# Altium PCB Boost.PcbDoc
Units mil, origin at the board's own origin, x right, y up, seen from the top; angles counter-clockwise.
Board outline 7240 x 4900 mil, 2 copper layers (Top Layer, Bottom Layer); 57 components, 166 nets, 170 pads, 46 vias.
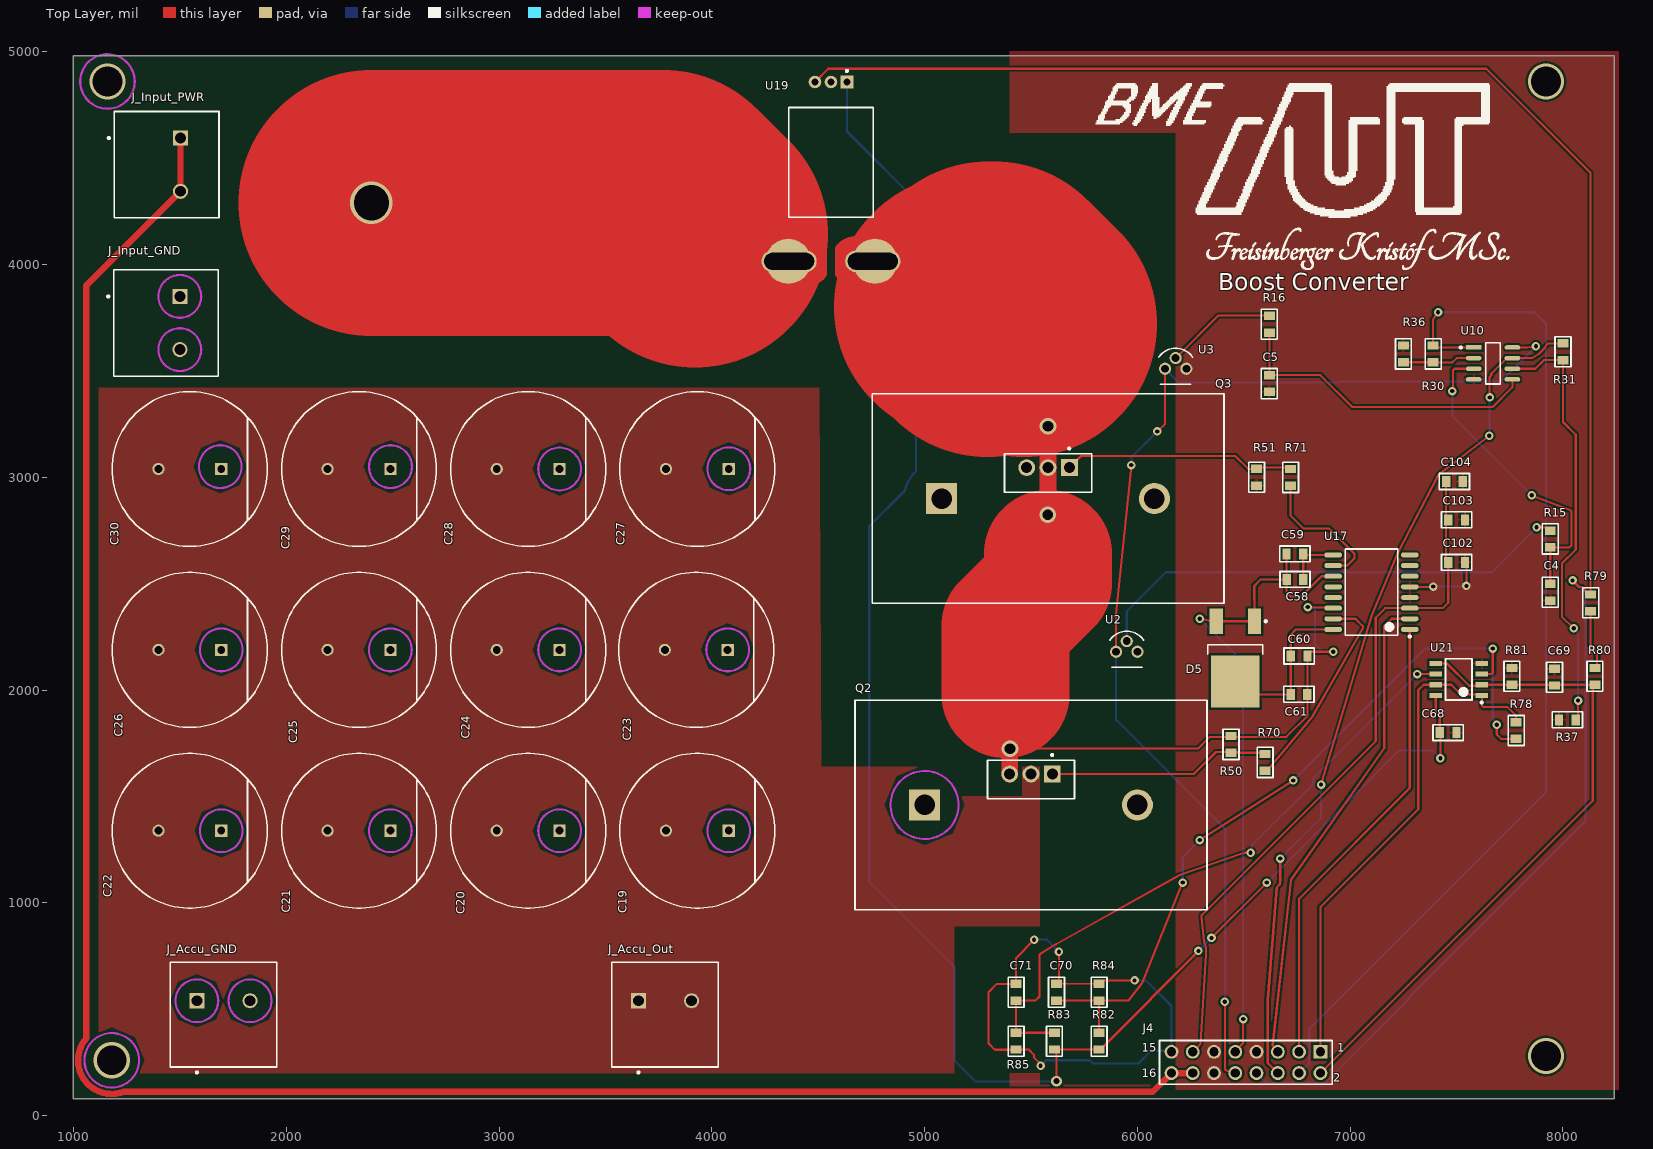
[diagram p0: Top Layer view]
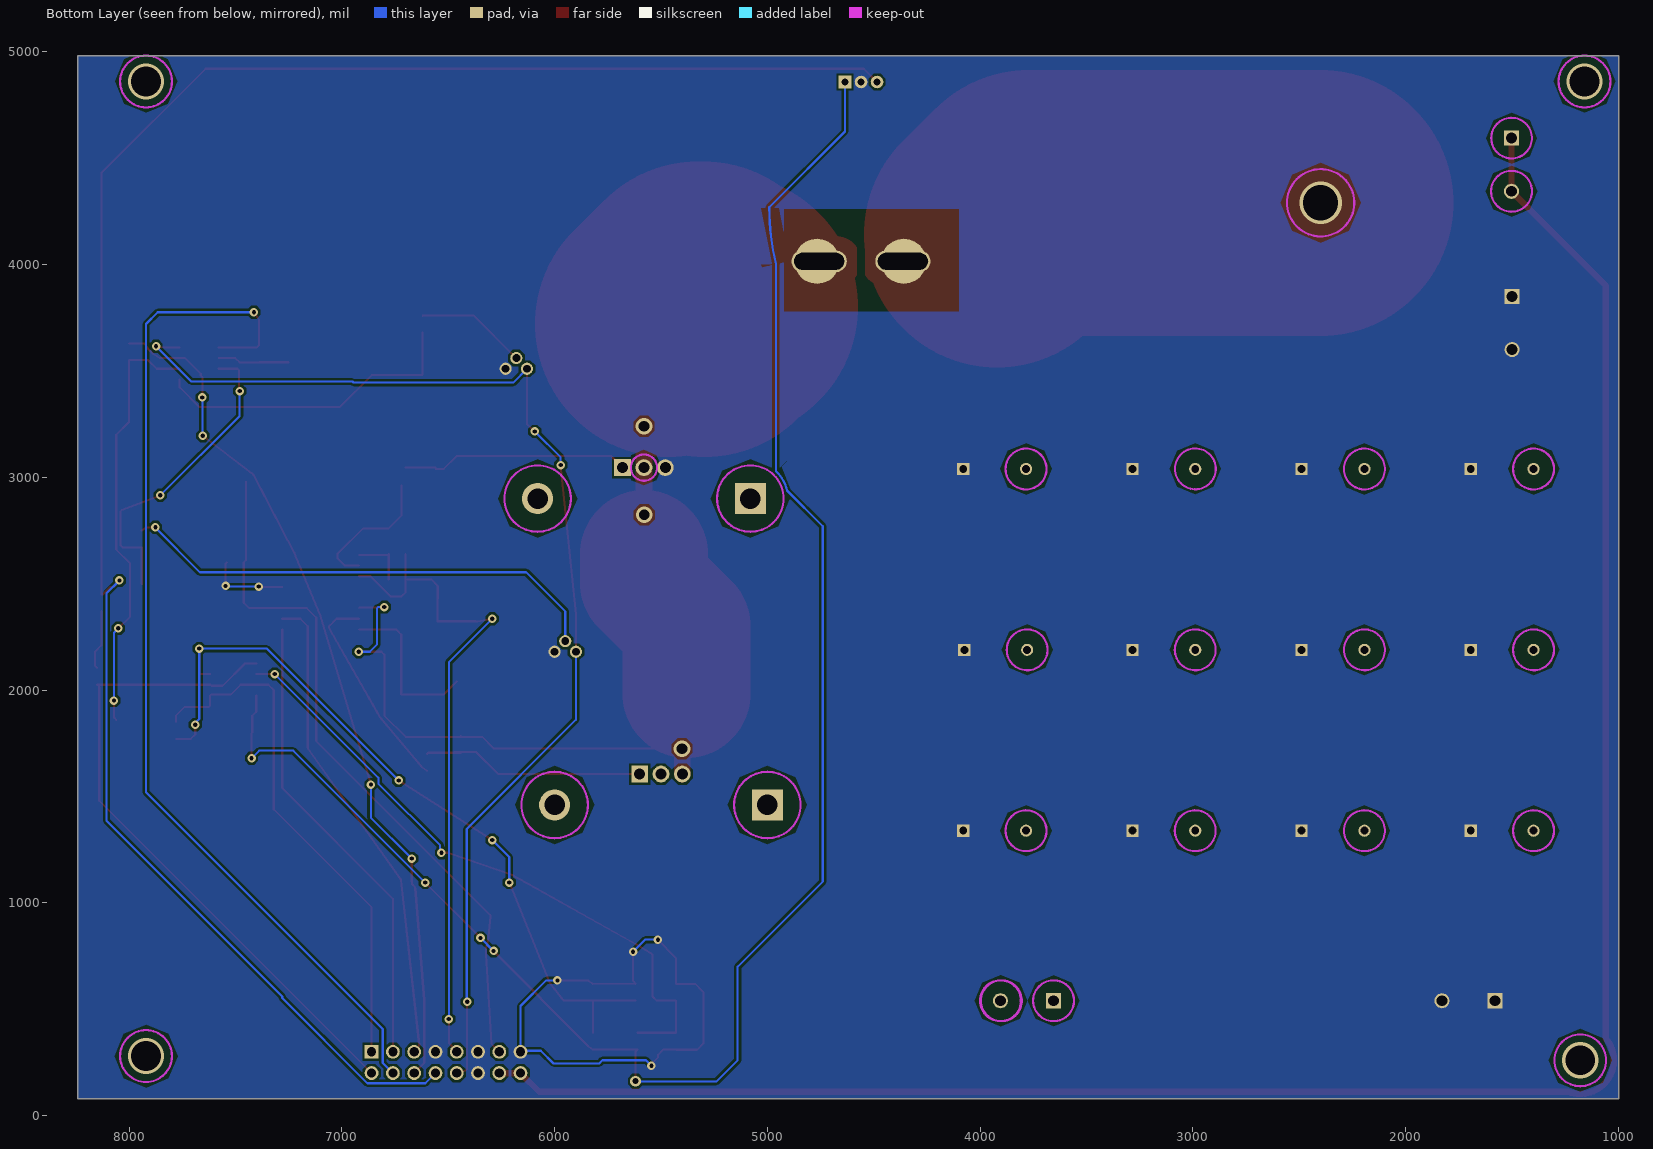
[diagram p1: Bottom Layer view, seen from below]
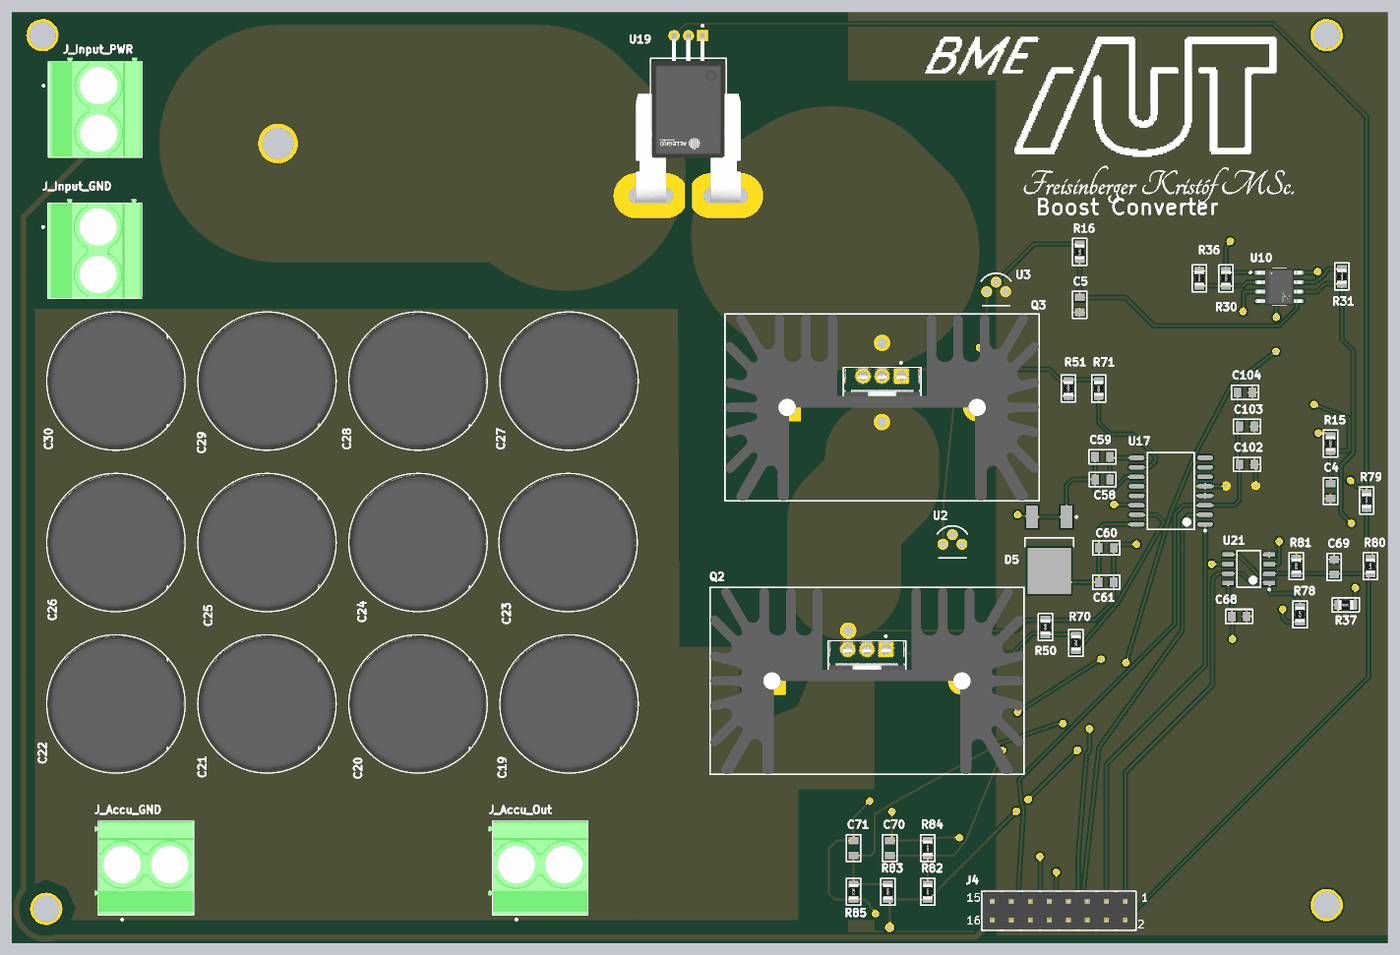
[diagram p2: 3D render of the assembled board from above, using the file's embedded part models]

## Layer stack, top to bottom
Top Solder: solder mask 0.4, Solder Resist, Dk 3.5
Top Layer: signal copper 1.4
Dielectric 1: dielectric 12.6, FR-4, Dk 4.8
Bottom Layer: signal copper 1.4
Bottom Solder: solder mask 0.4, Solder Resist, Dk 3.5

## Board outline
1000,80 8240,80 8240,4980 1000,4980

## Design rules (kind name [scope] priority, off if disabled: settings)
Clearance [All] p1: gap=10 ignorepadtopadclearanceinfootprint=FALSE except(0: Arc-Hole Track-Hole SMDPad-Hole THPad-Hole Via-Hole Fill-Hole Poly-Hole Region-Hole Text-Hole)
PlaneConnect [All] p1: pad.planeconnectstyle=Relief pad.reliefexpansion=20 pad.reliefentries=4 pad.reliefconductorwidth=10 pad.reliefairgap=10 via.planeconnectstyle=Relief via.reliefexpansion=20 via.reliefentries=4 via.reliefconductorwidth=10 via.reliefairgap=30
PolygonConnect [All] p1: thpad.connectstyle=Direct thpad.reliefconductorwidth=10 thpad.reliefentries=4 thpad.polygonreliefangle="90 Angle" thpad.airgapwidth=10 smdpad.connectstyle=Relief smdpad.reliefconductorwidth=10 smdpad.reliefentries=4 smdpad.polygonreliefangle="90 Angle" smdpad.airgapwidth=10 via.connectstyle=Direct via.reliefconductorwidth=10 via.reliefentries=4 via.polygonreliefangle="90 Angle" via.airgapwidth=10
RoutingVias [All] p1: holewidth=10 width=20 viastyle="Through Hole" minholewidth=5 minwidth=10 maxholewidth=28 maxwidth=50
SilkToSolderMaskClearance [IsPad] p1: minsilkscreentomaskgap=12 clearancetoexposedcopper=TRUE
SolderMaskExpansion [All] p1: expansion=4 istentingtop=FALSE
Width Width_1 [All] p1: maxlimit=2000 minlimit=10 preferedwidth=10 minimp=50.000000 maximp=50.000000 favimp=50.000000
Width [All] p2: maxlimit=2000 minlimit=10 preferedwidth=10 minimp=50.000000 maximp=50.000000 favimp=50.000000
28 further rules are at their usual default settings.

## Classes and differential pairs
component class Measurements: C4 C5 R15 R16 R30 R31 R36 R37 U2 U3 U10
component class Hall_sensor: C68 C69 C70 C71 R78 R79 R80 R81 R82 R83 R84 R85 U19 U21
component class Gate-Driver: C58 C59 C60 C61 C102 C103 C104 D5 R70 R71 U17
component class BoostConverter: C19 C20 C21 C22 C23 C24 C25 C26 C27 C28 C29 C30 F1 J4 J_Accu_GND J_Accu_Out J_Input_GND J_Input_PWR Q3 R50 R51

## Components (designator, comment, footprint, x,y, rotation, side; value= is the part's Value field where it differs from the comment)
C4 "22uF" FP_0805_CAP_085 7940,2460 r90 top
C5 "22uF" FP_0805_CAP_085 6620,3440.63 r90 top
C19 "330 uF" FP-LXW18X25-MFG 3932,1339 r180 top
C20 "330 uF" FP-LXW18X25-MFG 3137,1339 r180 top
C21 "330 uF" FP-LXW18X25-MFG 2342,1339 r180 top
C22 "330 uF" FP-LXW18X25-MFG 1547,1339 r180 top
C23 "330 uF" FP-LXW18X25-MFG 3927,2189 r180 top
C24 "330 uF" FP-LXW18X25-MFG 3137,2189 r180 top
C25 "330 uF" FP-LXW18X25-MFG 2342,2189 r180 top
C26 "330 uF" FP-LXW18X25-MFG 1547,2189 r180 top
C27 "330 uF" FP-LXW18X25-MFG 3932,3039 r180 top
C28 "330 uF" FP-LXW18X25-MFG 3137,3039 r180 top
C29 "330 uF" FP-LXW18X25-MFG 2342,3039 r180 top
C30 "330 uF" FP-LXW18X25-MFG 1547,3039 r180 top
C58 "100nF" FP_0805_CAP_085 6740.63,2520 r180 top
C59 "1uF" FP_0805_CAP_085 6740,2640 r180 top
C60 "100nF" FP_0805_CAP_085 6760,2160 r180 top
C61 "1uF" FP_0805_CAP_085 6759.37,1980 r180 top
C68 "100nF" FP_0805_CAP_085 7460,1800 r0 top
C69 "68nF" FP_0805_CAP_085 7960,2060.63 r90 top
C70 "100nF" FP_0805_CAP_085 5620,580 r90 top
C71 "100nF" FP_0805_CAP_085 5430,580 r90 top
C102 "100nF" FP_0805_CAP_085 7500,2600 r180 top
C103 "100nF" FP_0805_CAP_085 7500,2800 r180 top
C104 "100nF" FP_0805_CAP_085 7490,2980 r180 top
D5 "MBRD360T4G" ONSC-DPAK-3-369C-01_V 6460,2150.24 r270 top
J4 "61301621121" 61301621121 6510,250 r180 top
J_Accu_GND "1714955" Terminal-PHOE-1714955_V 1705,540 r0 top
J_Accu_Out "1714955" Terminal-PHOE-1714955_V 3780,540 r0 top
J_Input_GND "1714955" Terminal-PHOE-1714955_V 1500,3725 r270 top
J_Input_PWR "1714955" Terminal-PHOE-1714955_V 1503,4469 r270 top
Q2 "PSMN8R5-100PS" FP-TO-220AB-MFG 5500,1580 r270 top
Q3 "" FP-TO-220AB-MFG 5580,3020 r270 top
R15 "10K" FP_0805_RES 7940,2710 r270 top
R16 "10K" FP_0805_RES 6620,3719.37 r270 top
R30 "10K" FP_0805_RES 7390,3580 r270 top
R31 "10K" FP_0805_RES 8000,3590 r270 top
R36 "10K" FP_0805_RES 7250,3580 r270 top
R37 "10K" FP_0805_RES 8020.63,1860 r0 top
R50 "3.3K" FP_0805_RES 6440,1744.57 r270 top
R51 "3.3K" FP_0805_RES 6560,3000 r270 top
R70 "1.8" FP_0805_RES 6600,1660 r90 top
R71 "1.8" FP_0805_RES 6720,2999.37 r90 top
R78 "3K" FP_0805_RES 7780,1810 r270 top
R79 "220" FP_0805_RES 8130,2410 r90 top
R80 "10K" FP_0805_RES 8150,2064.57 r270 top
R81 "20K" FP_0805_RES 7760.01,2064.57 r90 top
R82 "10K" FP_0805_RES 5820,350 r90 top
R83 "22K" FP_0805_RES 5610,350 r90 top
R84 "20K" FP_0805_RES 5820,580 r90 top
R85 "10K" FP_0805_RES 5430,350 r270 top
U2 "MCP9700-E/TO" FP-C04-101-MFG 5950,2191.25 r270 top
U3 "MCP9700-E/TO" FP-C04-101-MFG 6180,3521.25 r270 top
U10 "LM358DR2G" FP-751-07-IPC_C 7671.18,3535 r0 top
U17 "2EDS8265HXUMA2" EXAR-WSOIC-16_N 7100,2460 r180 top
U19 "ACS758LCB-050B-PFF-T" FP-CB-5-PFF-MFG 4560,4480 r180 top
U21 "LM393DR2G" ONSC-SOIC-8-751-07_V 7510,2050 r180 top

## Footprints (in the part's own frame and the unit in brackets; to place one, negate y for a bottom-side part, rotate by r counter-clockwise, add the part's x,y. Pads: shape width x height; smd on the part's side, far side on the other; paste and mask are expansions set on the pad)
61301621121 [mm] "Pin Header, pitch 2.54 mm, THT, Vertical, dual row, 16p"
  rect 1.65x1.65 hole 1.1: 1(-8.89,-1.27)
  round 1.65 hole 1.1: 2(-8.89,1.27) 3(-6.35,-1.27) 4(-6.35,1.27) 5(-3.81,-1.27) 6(-3.81,1.27) 7(-1.27,-1.27) 8(-1.27,1.27) 9(1.27,-1.27) 10(1.27,1.27) 11(3.81,-1.27) 12(3.81,1.27) 13(6.35,-1.27) 14(6.35,1.27) 15(8.89,-1.27) 16(8.89,1.27)
  silkscreen extent -10.31,-2.61 10.31,2.61, body extent -10.16,-2.54 10.16,2.54, height 8.59
EXAR-WSOIC-16_N [mm] "SOIC, 16-Leads, Body 10.30x7.50mm, Pitch 1.27mm, IPC Medium Density"
  oval 2.1x0.6 smd: 1(-4.575,4.445) 2(-4.575,3.175) 3(-4.575,1.905) 4(-4.575,0.635) 5(-4.575,-0.635) 6(-4.575,-1.905) 7(-4.575,-3.175) 8(-4.575,-4.445) 9(4.575,-4.445) 10(4.575,-3.175) 11(4.575,-1.905) 12(4.575,-0.635) 13(4.575,0.635) 14(4.575,1.905) 15(4.575,3.175) 16(4.575,4.445)
  silkscreen extent -4.7,-5.15 3.13,5.42, body extent -3.75,-5.15 3.75,5.15, height 2.65
FP-751-07-IPC_C [mil]
  rect 73.78x21.39 smd paste+0 mask+0: 1(-91.18,75)
  rrect100% 73.78x21.39 smd paste+0 mask+0: 2(-91.18,25) 3(-91.18,-25) 4(-91.18,-75) 5(91.18,-75) 6(91.18,-25) 7(91.18,25) 8(91.18,75)
  silkscreen extent -157,-96 35,96, body extent -132,-100 132,100, height 10
FP-C04-101-MFG [mm]
  round 1.45 hole 0.95 paste-1000 mask+0: 1(0.286,-1.27) 2(-0.984,0) 3(0.286,1.27)
  silkscreen extent -2.17,-2.01 2.13,2.01
FP-CB-5-PFF-MFG [mm]
  rect 1.5x1.5 hole 0.8 paste-1000 mask+0: 1(-1.91,-9.59)
  round 1.5 hole 0.8 paste-1000 mask+0: 2(0,-9.59) 3(1.91,-9.59)
  rrect100% 6.6x2.6 hole 2 slot 6 at 0 deg paste-1000 mask+0: 4(5,11.809) 5(-5,11.809)
  round 5.4 smd paste-1000 mask+0: 4(5.099,11.809) 5(-5.25,11.809)
  round 5.4 smd far side paste-1000 mask+0: 4(5.099,11.809) 5(-5.25,11.809)
  Top Layer region: -0.5,10.151 -1.581,9.166 -3,8.81 -3,8.81 -7,8.809 -8.302,9.107 -9.345,9.939 -9.925,11.142 -9.925,12.477 -9.345,13.68 -8.302,14.512 -7,14.809 -7,14.81 -3,14.81 -1.581,14.453 -0.5,13.468 -0.5,13.468
  Top Layer region: 0.5,13.468 1.581,14.453 3,14.809 3,14.809 7,14.81 8.302,14.512 9.345,13.68 9.925,12.477 9.925,11.142 9.345,9.939 8.302,9.107 7,8.809 7,8.809 3,8.809 1.581,9.166 0.5,10.151 0.5,10.151
  silkscreen extent -5.05,-11.04 5.05,6.55, body extent -10.1,-10.44 10.1,14.91, height 0.25
FP-LXW18X25-MFG [mm]
  rect 1.45x1.45 hole 0.95 paste-1000 mask+0: 1(-3.75,0)
  round 1.45 hole 0.95 paste-1000 mask+0: 2(3.75,0)
  silkscreen extent -9.25,-9.25 9.25,9.25, body extent -9.35,-9.35 9.35,9.35, height 0.25
FP-TO-220AB-MFG [mm]
  rect 2x2 hole 1.3 paste-1000 mask+0: 1(-0.647,2.55)
  rect 3.7x3.7 hole 2.45 paste-1000 mask+0: 1(3.048,-12.7)
  round 2 hole 1.3 paste-1000 mask+0: 2(-0.647,0) 3(-0.647,-2.55)
  round 3.7 hole 2.45 paste-1000 mask+0: 2(3.048,12.7)
  Top Layer region: 12.816,-13.418 12.816,-13.418 12.816,-13.418 12.816,-13.418
  Top Layer region: 12.816,-13.418 12.816,-13.418 12.816,-13.418 12.816,-13.418
  Top Layer region: 12.816,-13.418 12.816,-13.418 12.816,-13.418 12.816,-13.418
  silkscreen extent -9.45,-21 15.55,21, body extent -9.55,-21.1 15.65,21.1, height 0.25
FP_0805_CAP_085 [mm] "0805 kapacitás YAGEO 0.85mm magas"
  rect 1x1.3 smd: 1(-1,0) 2(1,0)
  silkscreen extent -1.8,-0.95 1.8,0.95, body extent -1,-0.64 1.03,0.64, height 0.85
FP_0805_RES [mm] "0805 ellenállás"
  rect 1x1.3 smd: 1(-1,0) 2(1,0)
  silkscreen extent -1.8,-0.95 1.8,0.95, body extent -1,-0.62 1,0.63, height 0.62
ONSC-DPAK-3-369C-01_V [mm] "DPAK, 3-Leads, Body 6.54x6.095mm, Pitch 2.29mm"
  rect 3x1.6 smd: 1(-4.4,2.29) 3(-4.4,-2.29)
  rect 6.2x5.8 smd: 4(2.8,0)
  silkscreen extent -4.52,-3.27 -0.45,3.77, body extent -1.6,-3.27 4.49,3.27, height 2.38
ONSC-SOIC-8-751-07_V [mm] "SOIC, 8-Leads, Body 4.9x3.9mm, Pitch 1.27mm"
  rect 1.52x0.6 smd: 1(-2.74,1.905) 2(-2.74,0.635) 3(-2.74,-0.635) 4(-2.74,-1.905) 5(2.74,-1.905) 6(2.74,-0.635) 7(2.74,0.635) 8(2.74,1.905)
  silkscreen extent -2.87,-2.45 1.58,2.88, body extent -1.95,-2.45 1.95,2.45, height 1.75
Terminal-PHOE-1714955_V [mm] "Terminal Block, 2-Leads, Body 12.7x12.5mm, Pitch 6.35mm"
  rect 1.8x1.8 hole 1.3: 1(-3.175,0)
  round 1.8 hole 1.3: 2(3.175,0)
  silkscreen extent -6.35,-8.67 6.35,4.6, body extent -6.92,-7.9 6.35,4.6, height 21.51

## Part data
C4 C5 C58 C59 C60 C61 C68 C69 C70 C71 C102 C103 C104: library part CAP, "Capacitor"
C19 C20 C21 C22 C23 C24 C25 C26 C27 C28 C29 C30: library part CMP-35376-000008-1, "CAP ALUM 47UF 20% 500V THRUHOLE / 500LXW47MEFR18X25"
D5: library part CMP-1055-00192-1, "SWITCHMODE(TM) Power Rectifier, 3-Pin DPAK, Pb-Free, Tape and Reel", Manufacturer="On Semiconductor", ComponentLink1Description="Manufacturer URL", ComponentLink1URL=http://www.onsemi.com/, ComponentLink2Description=Datasheet, ComponentLink2URL=http://www.onsemi.com/pub_link/Collateral/MBRD320-D.PDF, ComponentLink3Description="Package Specification", ComponentLink3URL=http://www.onsemi.cn/pub_link/Collateral/369C.PDF, Configuration=Single, DatasheetVersion="Rev. 8", IFSM Max (A)=75, Mounting Technology="Surface Mount", PackageDescription="3-Pin Flange Mount, Body 6.54 x 6.095 mm, Pitch 2.29 mm", PackageReference=DPAK-3-369C-01, PackageVersion="Rev. E, 02/2014", Packing="Tape and Reel", PartNumber=MBRD360T4G, RoHS=TRUE
J4: library part CMP-1502-01097-1, "THT Vertical Pin Header WR-PHD, Pitch 2.54 mm, Dual Row, 16 pins", Contact Resistance=20mOhm, Manufacturer="Wurth Elektronik", Operating Temperature=-40to105degC, Rated Current=3A, Withstanding Voltage=500VAC, Working Voltage=250VAC, Datasheet URL=https://katalog.we-online.de/em/datasheet/6130xx21121.pdf, Gender=Male, Manufacturer URL=http://www.we-online.de, Mounting Technology=THT, Orientation=Vertical, Package Reference=61301621121, Packaging=Bag, Part Number=61301621121, Pin Number=16, Pitch=2.54mm, Publisher=WurthElektronik, Row Number=Dual
J_Accu_GND J_Accu_Out J_Input_GND J_Input_PWR: library part Terminal-CMP-2000-05797-1, "PC Terminal Block, Pitch 6.35 mm, 1 x 2 Position, Height 21.5 mm, Tail Lenght 5.1 mm, RoHS, Bulk", Manufacturer="Phoenix Contact", Package Description="PC Terminal Block, Pitch 6.35 mm, 1 x 2 Position, Height 21.5 mm, Tail Lenght 5.1 mm", Datasheet URL=http://media.digikey.com/pdf/Data%20Sheets/Phoenix%20Contact%20PDFs/1714955.pdf, Datasheet Version=02/2010, Manufacturer URL=http://www.phoenixcontact.com/, Mounting Technology=ThroughHole, Package Reference=1714955
Q2 Q3: library part NMOS-2, "N-channel 100 V 8.5 mΩ standard level MOSFET in TO220", ComponentLink1Description="Manufacturer Link", ComponentLink1URL=http://www.irf.com/, DatasheetVersion=PD-9.814, LatestRevisionDate=17-Jul-2002, LatestRevisionNote="Re-released for DXP Platform.", Note="Pin 2 is electrically connected to pin 4.", PackageDescription="TO, Thru-Hole, Vertical, Heatsink Mounted; 3 In-Line Leads; Pitch 2.54 mm", PackageReference=TO-220AB, PackageVersion=Feb-1997, Published=8-Jun-2000, Publisher="Altium Limited"
R15 R16 R30 R31 R36 R37 R50 R51 R70 R71 R78 R79 R80 R81 R82 R83 R84 R85: library part RES, "Resistor"
U2 U3: library part CMP-0192-00001-2, "SENSOR ANALOG -40C-125C TO92-3", Ambient Temperature Range High=+125°C, Ambient Temperature Range Low=-40°C, Manufacturer=Microchip, Max Junction Temp=+150°C, Max Supply Voltage=5.5V, Min Supply Voltage=2.3V, Operating Supply Current=6uA, Output Current=100uA, Output Voltage=500mV, Package=C04-101, Temperature="-40°C to +125°C", Automotive=No, Category=IC, ComponentLink2Description=Datasheet, ComponentLink2URL=http://ww1.microchip.com/downloads/en/DeviceDoc/20001942G.pdf, Device Class L1=Sensors, Device Class L2="Temperature and Humidity Sensors", Device Class L3=unset, Digikey Description="SENSOR ANALOG -40C-125C TO92-3", Footprint Url=http://ww1.microchip.com/downloads/en/DeviceDoc/3L_TO-92%20Plastic%20Transistor%20Outline_TO_C04-00101c.pdf, Height=5.334mm, Import Ts=1521170835, Ipc Land Pattern Name=TO-92, Lead Free=Yes, Manufacturer Part Number=MCP9700-E/TO, Mouser Description="Board Mount Temperature Sensors Lin Active Therm", Octopart=https://octopart.com/mcp9700-e%2Fto-microchip-668812, RoHS=TRUE, Sensor Output="Analog Voltage", Temperature Range High=+125°C, Temperature Range Low=-40°C
U10: library part CMP-1310-00291-2, "IC OPAMP GP 2 CIRCUIT 8SOIC", Case/Package=SOIC, Dual Supply Voltage=9V, Input Bias Current=250nA, Input Offset Voltage (Vos)=7mV, Max Dual Supply Voltage=16V, Max Operating Temperature=70°C, Max Supply Voltage=32V, Min Dual Supply Voltage=1.5V, Min Operating Temperature=0°C, Min Supply Voltage=3V, Nominal Supply Current=1.2mA, Operating Supply Current=1.5mA, Output Current=40mA, Package Quantity=2500, Power Supply Rejection Ratio (PSRR)=65dB, Voltage Gain=100dB, Bandwidth=1MHz, Common Mode Rejection Ratio=65dB, Contact Plating=Tin, Gain Bandwidth Product=1MHz, Halogen Free="Halogen Free", Height=1.5mm, Lead Free="Lead Free", Length=5mm, Number of Amplifiers=2, Number of Channels=2, Number of Circuits=2, Number of Elements=2, Number of Pins=8, Operating Supply Voltage=16V, Output Current per Channel=40mA, Packaging="Tape and Reel", Radiation Hardening=No, REACH SVHC="No SVHC", Slew Rate=0.6V/µs, Width=4mm
U17: library part GATE_DRIVER_2EDS8265HXUMA2, "2EDS8265HXUMA2 / Gate-Driver 8A", Case/Package="SOIC W", Manufacturer=Exar, Max Operating Temperature=70°C, Max Power Dissipation=1.26W, Max Supply Voltage=5.5V, Min Operating Temperature=0°C, Min Supply Voltage=3V, Nominal Supply Current=1mA, Package Quantity=41, Category="RS-232 / RS-422 / RS-485 Interface ICs", ComponentLink1Description=https://datasheet.ciiva.com/22828/0900766b81141d49-22828237.pdf?src-supplier=RSComponents, ComponentLink1URL=https://datasheet.ciiva.com/22828/0900766b81141d49-22828237.pdf?src-supplier=RSComponents, ComponentLink2Description=https://datasheet.ciiva.com/1715/sp3222eb-sp3232eb-103-081414-1715199.pdf?src-supplier=Digi-Key, ComponentLink2URL=https://datasheet.ciiva.com/1715/sp3222eb-sp3232eb-103-081414-1715199.pdf?src-supplier=Digi-Key, ComponentLink3Description=https://datasheet.ciiva.com/16380/sp3232ebca-l-16380121.pdf?src-supplier=Future+Electronics, ComponentLink3URL=https://datasheet.ciiva.com/16380/sp3232ebca-l-16380121.pdf?src-supplier=Future+Electronics, ComponentLink4Description=https://datasheet.ciiva.com/15208/getdatasheetpartid-558353-15208838.pdf?src-supplier=Verical, ComponentLink4URL=https://datasheet.ciiva.com/15208/getdatasheetpartid-558353-15208838.pdf?src-supplier=Verical, Height=2.55mm, Lead Free="Lead Free", Length=10.3mm, Logic Function=Transceiver, Manufacturer Part Number=2EDS8265HXUMA2, Number of Drivers=2, Number of I/Os=4, Number of Pins=16, Number of Receivers=2, Number of Transceivers=1, Number of Transmitters=2, Packaging=Rail/Tube, Propagation Delay=0.15us, Radiation Hardening=No, RoHS=Yes, Series=-, Supplier 1="Allied Electronics", Supply Current=1mA, Width=7.5mm
U19: library part ACS758LCB-CMP-82923-000254-1, "SENSOR CURRENT HALL 50A AC/DC", Current Sensing=50A, Frequency=120kHz, Max Operating Temperature=150°C, Max Supply Current=13.5mA, Max Supply Voltage=5.5V, Min Operating Temperature=-40°C, Min Supply Voltage=3V, Operating Supply Voltage=5V, Output Current=1mA, Package Quantity=34, Quiescent Current=10mA, Accuracy=2%, Bandwidth=120kHz, Height=7mm, Lead Free="Lead Free", Length=10mm, Linearity=1%, Mount="Through Hole", Number of Channels=1, Number of Pins=5, Packaging=Rail/Tube, Polarity=Bidirectional, Radiation Hardening=No, REACH SVHC="No SVHC", Response Time=4us, RoHS Compliant=Yes, Sensitivity=40mV/A, Series=-, Width=13mm
U21: library part CMP-1305-00048-1, "Low Offset Voltage Dual Comparators, 2 to 36 V, 0 to 70 degC, 8-Pin SOIC, Pb-Free, Tape and Reel", Manufacturer="On Semiconductor", ComponentLink1Description="Manufacturer URL", ComponentLink1URL=http://www.onsemi.com/, ComponentLink2Description=Datasheet, ComponentLink2URL=http://www.onsemi.com/pub_link/Collateral/LM393-D.PDF, ComponentLink3Description="Package Specification", ComponentLink3URL=http://www.onsemi.com/pub_link/Collateral/751-07.PDF, DatasheetVersion="Rev. 25", ICC Typ (mA)=0.4, IO Typ (mA)=16, Mounting Technology="Surface Mount", PackageDescription="8-Pin Small Outline Integrated Circuit, Body 4.9 x 3.9 mm, Pitch 1.27 mm", PackageReference=SOIC-8-751-07, PackageVersion="Rev. AK, 02/2011", Packing="Tape and Reel", PartNumber=LM393DR2G, RoHS=TRUE, VCC Max (V)=36, VCC Min (V)=2

## Via types
v1: diameter 40, hole 20, Top Layer to Bottom Layer, 37 vias
v2: diameter 170, hole 140, Top Layer to Bottom Layer, 4 vias
v3: diameter 78, hole 50, Top Layer to Bottom Layer, 3 vias
v4: diameter 50, hole 28, Top Layer to Bottom Layer, 1 vias
v5: diameter 200, hole 165, Top Layer to Bottom Layer, 1 vias

## Nets (pads, with @x,y where several pads share a name; then routed paths per layer and width w, separated by ;. In a path a pad name is that pad's centre, name@x,y a point inside that pad or via, vN(x,y) a via of type N, cw(c..) or ccw(c..) an arc to the next point about the centre after c; other vN are vias at no path point)
0.19V: 
1.5625V: C71.1 R83.2 R85.1 U21.6 | length 3005.2
  Top Layer w10: R83.2 R85.1 C71.1 5520.63,540.63 5540,560 5540,755.86 5545.86,761.72 5617,805.62 6198.49,1130.29 6492,1231.5 6502.99,1235.29 v1(6532,1235.29) ; v1(7315.12,2075) U21.6
  Bottom Layer w10: v1(6532,1235.29) 6537.74,1241.03 6537.74,1270.04 6828.27,1560.57 6828.27,1588.15 v1(7315.12,2075)
1V8: 
3.3V: C70.1 R78.2 R82.2 R84.1 U21.3 | length 3731
  Top Layer w10: C70.1 R84.1 ; R82.2 R84.1 ; v1(6212.99,1095.29) 6021.5,621.12 5962.35,546.49 5956.49,540.63 R84.1 ; v1(6292.99,1295.29) v1(6732.99,1575.29) ; U21.3 7664.14,2075 7670,2080.86 v1(7670,2195) ; v1(7688.67,1836.96) 7688.67,1791.33 7709.37,1770.63 R78.2
  Bottom Layer w10: v1(6212.99,1095.29) 6212.99,1215.29 v1(6292.99,1295.29) ; v1(6732.99,1575.29) 7352.7,2195 v1(7670,2195) 7670,1863.74 7688.67,1845.07 v1(7688.67,1836.96)
3V3: 
5V: C68.1 R82.1 R83.1 U19.1 U21.8 | length 8387
  Top Layer w10: v4(5620,161.94) 5620,300.63 5617.07,303.56 R83.1 R82.1 5840.59,325.31 v1(6286.9,773.93) ; v1(6348.27,835.29) v1(6607.99,1095.29) ; U21.8 7402.13,1897.87 7420.63,1879.37 C68.1 7423.98,1796.65 v1(7423.98,1680)
  Bottom Layer w10: U19.1 4635.2,4624.8 4988.26,4271.74 4991.19,4268.81 4991.19,4264.67 cw(c3827.22,4268.8) 4960.26,4002.21 ccw(c4970,3999.96) 4960,4000 4960,3029.17 4957.07,3026.24 ; 4957.05,3026.22 ccw(c5080,2900) 4907.92,2937.92 4740,2770 4740,1100 5140,700 5140,260 5240,160 5618.06,160 v4(5620,161.94) ; v1(6286.9,773.93) v1(6348.27,835.29) ; v1(6607.99,1095.29) 7227.99,1715.29 7388.68,1715.29 v1(7423.98,1680)
10V: 
/XRS: 
Accumulator_GND: C4.1 C5.1 C19.1 C20.1 C21.1 C22.1 C23.1 C24.1 C25.1 C26.1 C27.1 C28.1 C29.1 C30.1 C68.2 C69.2 C70.2 C71.2 C102.1 C103.1 C104.1 J4.7 J4.11 J4.12 J4.15 J_Accu_GND.1 J_Accu_GND.2 J_Input_GND.1 J_Input_GND.2 Q3.3 R36.1 R37.1 R51.2 R81.2 R84.2 R85.2 U2.3 U3.3 U10.4 U17.4 U17.5 U19.2 U21.4 | length 2544.1
  Top Layer w10: R85.2 5489.37,310.63 5513.73,286.27 5513.73,273.96 5519.59,268.1 5545,242.69 v1(5545,235) ; C71.2 5430,740.86 v1(5514.26,827.24) ; v1(5631.5,770.62) 5631.5,634.06 C70.2 R84.2@5820,620.32 ; R84.2 5840.59,634.06 v1(5986.5,635.62) ; U17.5 v1@7390,2485 ; C102.1 7546.53,2592.84 v1(7546.53,2489.47)
  Bottom Layer w10: v1(5514.26,827.24) 5574.88,827.24 v1(5631.5,770.62) ; v1(5545,235) 5570.29,260.29 5775.41,260.29 5790.7,245 6005,245 6065,305 6155,305 J4.15 6160,515 6039.38,635.62 v1(5986.5,635.62) ; v1(7390.33,2486.35) 7541.35,2486.35 v1@7545,2490
Accumulator_Voltage_Boost: C19.2 C20.2 C21.2 C22.2 C23.2 C24.2 C25.2 C26.2 C27.2 C28.2 C29.2 C30.2 J_Accu_Out.1 J_Accu_Out.2 Q2.2@5500,1605.49
BDS: 
COMP: 
D+: 
D-: 
Fuse_Input: J4.14 J4.16 J_Input_PWR.1 J_Input_PWR.2 | length 9892.6
  Top Layer w30: J_Input_PWR.1 J_Input_PWR.2 1060,3901 1060,362.88 ccw(c1180,260) 1235.33,111.94 6071.94,111.94 J4.16 J4.14
Fuse_Output: U19.4 | length 1582.1
  Top Layer w1250: v5(2400,4290) 3770,4290 3920,4140
GDRV: 
NetB2_3: 
NetC1_2: 
NetC3_1: 
NetC4_2: C4.2 R15.2 U10.3 | length 1480.8
  Top Layer w10: v1(7480,3405) 7482.93,3407.93 7482.93,3494.64 7482.93,3502.93 7490,3510 U10.3 ; v1(7852.99,2915.29) 8034.14,2845.86 8040,2840 8040,2680 8030.63,2670.63 R15.2 C4.2
  Bottom Layer w10: v1(7480,3405) 7480,3288.28 v1(7852.99,2915.29)
NetC5_2: C5.2 R16.2 U10.5 | length 1480.4
  Top Layer w10: R16.2 C5.2 6860,3480 7010,3330 7670,3330 7762.37,3422.37 U10.5
NetC6_2: 
NetC7_2: 
NetC8_2: 
NetC9_2: 
NetC10_2: 
NetC11_2: 
NetC12_2: 
NetC13_2: 
NetC14_1: 
NetC18_1: 
NetC31_2: 
NetC44_1: 
NetC44_2: 
NetC46_2: 
NetC50_1: 
NetC52_1: 
NetC52_2: 
NetC54_1: 
NetC56_1: 
NetC56_2: 
NetC58_1: C58.1 C59.1 U17.9 | length 262.8
  Top Layer w10: C58.1 6779.37,2520.63 C59.1 6784.37,2635 U17.9
NetC58_2: C58.2 C59.2 D5.1 D5.3 J4.9 U17.11 | length 3172.8
  Top Layer w10: v1(6292.99,2335.29) 6361.02,2322.93 6369.31,2322.93 D5.3 D5.1 6550.16,2427.82 6549.3,2428.68 6549.3,2489.3 6580,2520 C58.2 ; J4.9 6460,304.63 6497,341.63 v1(6497,453.71) ; C59.2 6700.63,2520.63 C58.2 ; U17.11 6865,2535 6770,2440 6720,2440 6700,2460 6700,2518.74 C58.2
  Bottom Layer w10: v1(6292.99,2335.29) 6497,2131.29 v1(6497,453.71)
NetC60_1: C60.1 C61.1 Q2.3 Q3.2@5580,3045.49 R50.1 U17.14 U19.5 | length 4104.8
  Top Layer w10: v3(5401.31,1724.8) 6284.8,1724.8 6340,1780 R50.1@6440,1780 ; R50.1 6443.94,1780 6700,1780 6800,1880 6800,1978.74 C61.1 6798.74,2159.37 C60.1 6799.37,2165.31 6814.05,2180 v1(6920,2180) ; v1(6800,2390) 6802.5,2387.5 6917.38,2387.5 U17.14
  Top Layer w78: Q2.3 5399.75,1605.63 v3@5399.75,1699.75 ; v3@5580,2820 5580,3045.49 v3(5580,3240)
  Top Layer w600: 5380,1980 5380,2302.11 5580,2502.11 5580,2640
  Top Layer w1250: 5200,3800 5285.01,3800 5330.8,3754.21 ; 5296.46,3719.86 5330.8,3754.21 ; 5466.46,3719.86 5326.32,3860 5300,3860 5330.8,3829.2 5330.8,3754.21
  Bottom Layer w10: v1(6800,2390) 6800.36,2389.64 6829.14,2389.64 6835,2383.79 6835,2213.28 6868.28,2180 v1(6920,2180)
  other v3: 5579,2823.22
NetC60_2: C60.2 C61.2 D5.4 U17.16 | length 775.1
  Top Layer w10: D5.4 6520,1980 C61.2 6720.63,1980.63 C60.2 6720.63,2260.63 6745,2285 U17.16
NetC65_1: 
NetC69_1: C69.1 J4.2 R80.2 R81.1 U21.2 U21.5 | length 3152.8
  Top Layer w10: J4.2 8140,1480 8140,2015.2 R80.2@8149.8,2025 ; U21.5 7455,2125 7560,2020 7612.87,2020 U21.2 R80.2@8149.8,2025 ; R80.2 R80.2@8149.8,2025
NetC72_1: 
NetC72_2: 
NetC73_2: 
NetC74_2: 
NetC102_2: C102.2 C103.2 C104.2 J4.13 U17.3 | length 3339.7
  Top Layer w10: J4.13 6295.98,335.98 6321.9,759.43 6321.9,788.43 6313.27,820.8 6301.84,933.56 6301.84,941.84 7120,1760 7120,2340 7165,2385 U17.3 7435,2385 7460.63,2410.63 C102.2 7450.63,2610 C104.2
NetD1_4: 
NetDS1_1: 
NetDS2_1: 
NetDS2_2: 
NetDS3_1: 
NetDS3_2: 
NetDS4_1: 
NetDS4_2: 
NetDS5_1: 
NetDS6_1: 
NetDS7_1: 
NetDS8_1: 
NetDS8_2: 
NetDS9_1: 
NetDS9_2: 
NetFB1_1: 
NetIC1_2: 
NetIC1_3: 
NetJ3_1: 
NetJ3_2: 
NetJ3_4: 
NetJ3_6: 
NetJ3_8: 
NetJ4_1: J4.1 R78.1 U21.1 U21.7 | length 2479.1
  Top Layer w10: J4.1 6860,980 7320,1440 7320,2000 7345,2025 U21.7 7475,2025 7520,1980 7612.87,1980 U21.1 7620,1972.87 7620,1925.86 7625.86,1920 7740,1920 7780,1880 R78.1
NetJ4_3: J4.3 U17.1 | length 2200.4
  Top Layer w10: J4.3 6760,1020 7280.12,1540.12 U17.1
NetJ4_4: J4.4 R30.1 U10.1 | length 4887.3
  Top Layer w10: v1(7412.99,3775.29) 7390,3741.72 R30.1 7399.37,3610 U10.1
  Bottom Layer w10: J4.4 6807.48,247.48 6807.48,407.48 7920,1520 7920,3720 7864.71,3775.29 v1(7412.99,3775.29)
NetJ4_5: J4.5 U17.2 | length 2287.5
  Top Layer w10: J4.5 6638.35,326.99 6636.16,329.73 6636.16,333.79 6721.01,1106.29 6721.3,1108.87 7160,1726.94 7160,2300 7195,2335 U17.2
NetJ4_6: J4.6 R31.1 U10.7 | length 4021.4
  Top Layer w10: J4.6 6612.52,247.48 6612.52,541.06 6654.99,1070.41 6655.28,1074.08 6669.94,1088.74 6671.6,1109.41 v1(6671.6,1208.4) ; v1@6861.53,1552.12 v1(6863.27,1555.72) 7100,2348.28 7223.78,2646.11 7415.94,3011.8 7424.73,3020.59 v1(7652.99,3195.29) ; v1(7655.31,3375.29) 7655,3375.61 7655,3470.54 7662.93,3478.47 7662.93,3486.76 7736.17,3560 U10.7 7855.86,3560 7887.49,3580.29 7907.99,3600.8 7923.51,3623.51 7929.37,3629.37 R31.1
  Bottom Layer w10: v1(6671.6,1208.4) 6863.27,1400.07 v1(6863.27,1555.72) ; v1(7652.99,3195.29) 7654.15,3196.45 7654.15,3374.13 v1(7655.31,3375.29)
NetJ4_8: J4.8 R79.2 U19.3 | length 9201.7
  Top Layer w10: U19.3 4547.23,4920 7640,4920 8130,4430 R79.2 8124.09,2449.37 8088.84,2484.63 8075.37,2484.63 v1(8045,2515)
  Bottom Layer w10: J4.8 6607.48,152.52 6879.67,152.52 7280,552.85 7280,560 8105.81,1385.81 8105.81,2454.19 v1(8045,2515)
NetJ4_10: J4.10 U2.1 U3.1 U10.8 | length 5580
  Top Layer w10: U2.1 5900,2355.86 v1(5971.51,3057.44) ; v1(6092.99,3215.29) 6124.14,3244.14 6130,3250 U3.1 ; v1(6410,535) 6412.52,532.48 6412.52,217.51 6417.23,212.79 J4.10 ; U10.8 7832.99,3610 v1(7872.99,3615.29)
  Bottom Layer w10: U2.1 5900,1860 6412.99,1347.01 6412.99,537.99 v1(6410,535) ; v1(5971.51,3057.44) 5971.51,3093.81 v1(6092.99,3215.29) ; U3.1 6195,3445 6944.79,3445 6950.08,3450.29 7707.99,3450.29 v1(7872.99,3615.29)
NetJP1_1: 
NetK_COM: 
NetL2_2: 
NetP2_3: 
NetP3_3: 
NetP3_4: 
NetP3_5: 
NetP3_6: 
NetP4_1: 
NetP4_2: 
NetP4_3: 
NetP4_4: 
NetP5_1: 
NetP5_2: 
NetP5_3: 
NetP5_4: 
NetP5_5: 
NetP5_6: 
NetQ1_3: 
NetQ2_1: Q2.1@5600.39,1605.49 R50.2 R70.2 | length 1074.1
  Top Layer w10: Q2.1@5600.39,1605.49 6265.49,1605.49 6369.13,1709.13 6440,1709.13 6469.13,1709.13 ; R50.2 6469.13,1705.2 6594.17,1705.2 R70.2
NetQ3_1: Q3.1@5680.39,3045.49 R51.1 R71.2 | length 1067.3
  Top Layer w10: Q3.1@5680.39,3045.49 5734.9,3100 6460,3100 6520.63,3039.37 R51.1 ; R51.1@6560,3045.49 R71.2@6700,3045.49
NetQ4_1: 
NetQ5_1: 
NetQ6_1: 
NetQ7_1: 
NetQ8_2: 
NetQ9_2: 
NetQ10_2: 
NetQ11_2: 
NetR3_2: 
NetR4_2: 
NetR5_2: 
NetR6_2: 
NetR9_2: 
NetR10_1: 
NetR11_1: 
NetR12_1: 
NetR13_1: 
NetR14_1: 
NetR14_2: 
NetR15_1: R15.1 U2.2 | length 2299.5
  Top Layer w10: v1(7875.75,2764.66) 7919.41,2764.06 R15.1
  Bottom Layer w10: U2.2 5950,2370 6133.73,2553.73 7667.12,2553.73 7875.75,2762.36 v1(7875.75,2764.66)
NetR16_1: R16.1 U3.2 | length 523.4
  Top Layer w10: U3.2 6380,3760 6618.74,3760 R16.1
NetR17_1: 
NetR21_2: 
NetR22_1: 
NetR23_1: 
NetR24_1: 
NetR26_2: 
NetR27_2: 
NetR28_2: 
NetR29_2: 
NetR30_2: R30.2 R36.2 U10.2 | length 338.5
  Top Layer w10: R36.2 R30.2 7390.63,3540 7480,3540 7500,3560 U10.2
NetR31_2: R31.2 R37.2 U10.6 | length 2032.8
  Top Layer w10: U10.6 7870,3510 7910.63,3550.63 R31.2 8000,3260 8060,3200 8060,2660 7995,2595 7995,2345 v1(8050,2290) ; R37.2 8070.81,1870.81 v1(8070.81,1950.81)
  Bottom Layer w10: v1(8050,2290) 8070.81,2269.19 v1(8070.81,1950.81)
  other v1: 8050,2290
NetR47_1: 
NetR48_1: 
NetR57_1: 
NetR66_1: 
NetR67_1: 
NetR68_1: 
NetR69_1: 
NetR70_1: R70.1 U17.15 | length 981.2
  Top Layer w10: R70.1 6620.59,1635.32 6820,1871.72 7060,2291.72 7060,2300 7057.07,2302.93 7025,2335 U17.15
NetR71_1: R71.1 U17.10 | length 649.2
  Top Layer w10: R71.1 6720,2820 6780,2760 6900,2760 7020,2640 7020,2620 6985,2585 U17.10
NetR72_1: 
NetR73_1: 
NetR73_2: 
NetR79_1: R79.1 R80.1 | length 283.3
  Top Layer w10: R79.1 8130,2210 8160,2180 8160,2113.94 R80.1
NetR90_1: 
NetR93_1: 
NetR95_2: 
NetR98_1: 
NetR99_1: 
NetT1_4: 
NetU1_40: 
PWM_BOOST_H: 
PWM_BOOST_L: 
Relay: 
RESET_USB: 
SHIELD: 
SI: 
SI_GND: 
USB_5V: 
USB_5V_IN: 
VCCIO: 
pads on no net: Q2.1@5000,1460 Q2.2@6000,1460 Q3.1@5080,2900 Q3.2@6080,2900 U17.6 U17.7 U17.8 U17.12 U17.13
copper on no net: | length 528.7
  Top Layer w10: 5430,310 5330,310 5300,340 5300,580 5339.37,619.37 5430,619.37
  other v2: 1180,260 7920,280 1160,4860 7920,4860

## Polygon pours and split planes (outlines as drawn)
Accumulator_GND on Top Layer "ACCUMULATOR_GND_L01_P003" (solid, pour order 3): 8261.21,121.21 8261.21,5001.21 5401.21,5001.21 5401.21,121.21
Accumulator_Voltage_Boost on Top Layer "ACCUMULATOR_VOLTAGE_BOOST_L01_P002" (solid, pour order 2): 1120,3420 5560,3420 5560,200 1120,200
Accumulator_GND on Bottom Layer "ACCUMULATOR_GND_L02_P000" (solid, pour order 0): 1000,4980 1000,80 8240,80 8240,4980

## Keep-outs
Top Layer:
  circle w10: c5000,1460 r160
  circle w10: c1160,4860 r128.06
  circle w10: c1180,260 r128.06
  circle w10: c1830,540 r100.5
  circle w10: c1580,540 r100.5
  circle w10: c4074.64,2189 r100.5
  circle w10: c4079.64,1339 r100.5
  circle w10: c3284.64,1339 r100.5
  circle w10: c3284.64,2189 r100.5
  circle w10: c2489.64,2189 r100.5
  circle w10: c2489.64,1339 r100.5
  circle w10: c1694.64,1339 r100.5
  circle w10: c1694.64,2189 r100.5
  circle w10: c3284.64,3039 r100.5
  circle w10: c4080,3040 r100.5
  circle w10: c2490,3050 r100.5
  circle w10: c1690,3050 r100.5
  circle w10: c1500,3600 r100.5
  circle w10: c1500,3850 r100.5
Bottom Layer:
  circle w10: c7920,4860 r121.66
  circle w10: c7920,280 r121.66
  circle w10: c1180,260 r121.66
  circle w10: c1160,4860 r121.66
  circle w10: c5580,3045.49 r61.73
  circle w10: c5080,2900 r156.21
  circle w10: c6080,2900 r156.21
  circle w10: c6000,1460 r156.21
  circle w10: c5000,1460 r156.21
  circle w10: c3905,540 r96.05
  circle w10: c3900,540 r96.05
  circle w10: c3655,540 r96.05
  circle w10: c3784.36,3039 r96.05
  circle w10: c3779.36,2189 r96.05
  circle w10: c3784.36,1339 r96.05
  circle w10: c2989.36,1339 r96.05
  circle w10: c2989.36,2189 r96.05
  circle w10: c2988.93,3039.44 r96.05
  circle w10: c2194.36,3039 r96.05
  circle w10: c2194.36,2189 r96.05
  circle w10: c2194.36,1339 r96.05
  circle w10: c1399.36,1339 r96.05
  circle w10: c1399.36,2189 r96.05
  circle w10: c1399.36,3039 r96.05
  circle w10: c1503,4344 r96.05
  circle w10: c1503,4594 r95.52
  circle w10: c2400,4290 r158.11

## Other copper
Top Layer:
  pour cut-out: 6180,1725 6180,125 6160,145 5540,145 5540,1725
  pour cut-out: 5120,1760 5120,1500 5460,1500 5460,1760
  pour cut-out: 4500,4620 6180,4620 6180,1640 4513.24,1640
  pour cut-out: 5140,890 5580,890 5580,189.8 5569.8,200 5140,200
Bottom Layer:
  pour cut-out: 4100,4260 4100,3780 4920,3780 4920,4260

## Silkscreen, mask and mechanical layers (free items; w line width, h text height)
Top Overlay:
  drawing of 31 lines, arcs and shapes, not listed
  text "Boost Converter" at 6380,3880 h80

## Text inside footprints (layer, text, board x,y; h text height)
J4: Top Overlay "16" at 6020,180 h40; Top Overlay "15" at 6020,300 h40; Top Overlay "1" at 6940,300 h40; Top Overlay "2" at 6920,160 h40